# EAGLE board kinesisBLE V6 (EAGLE 9.6.2)
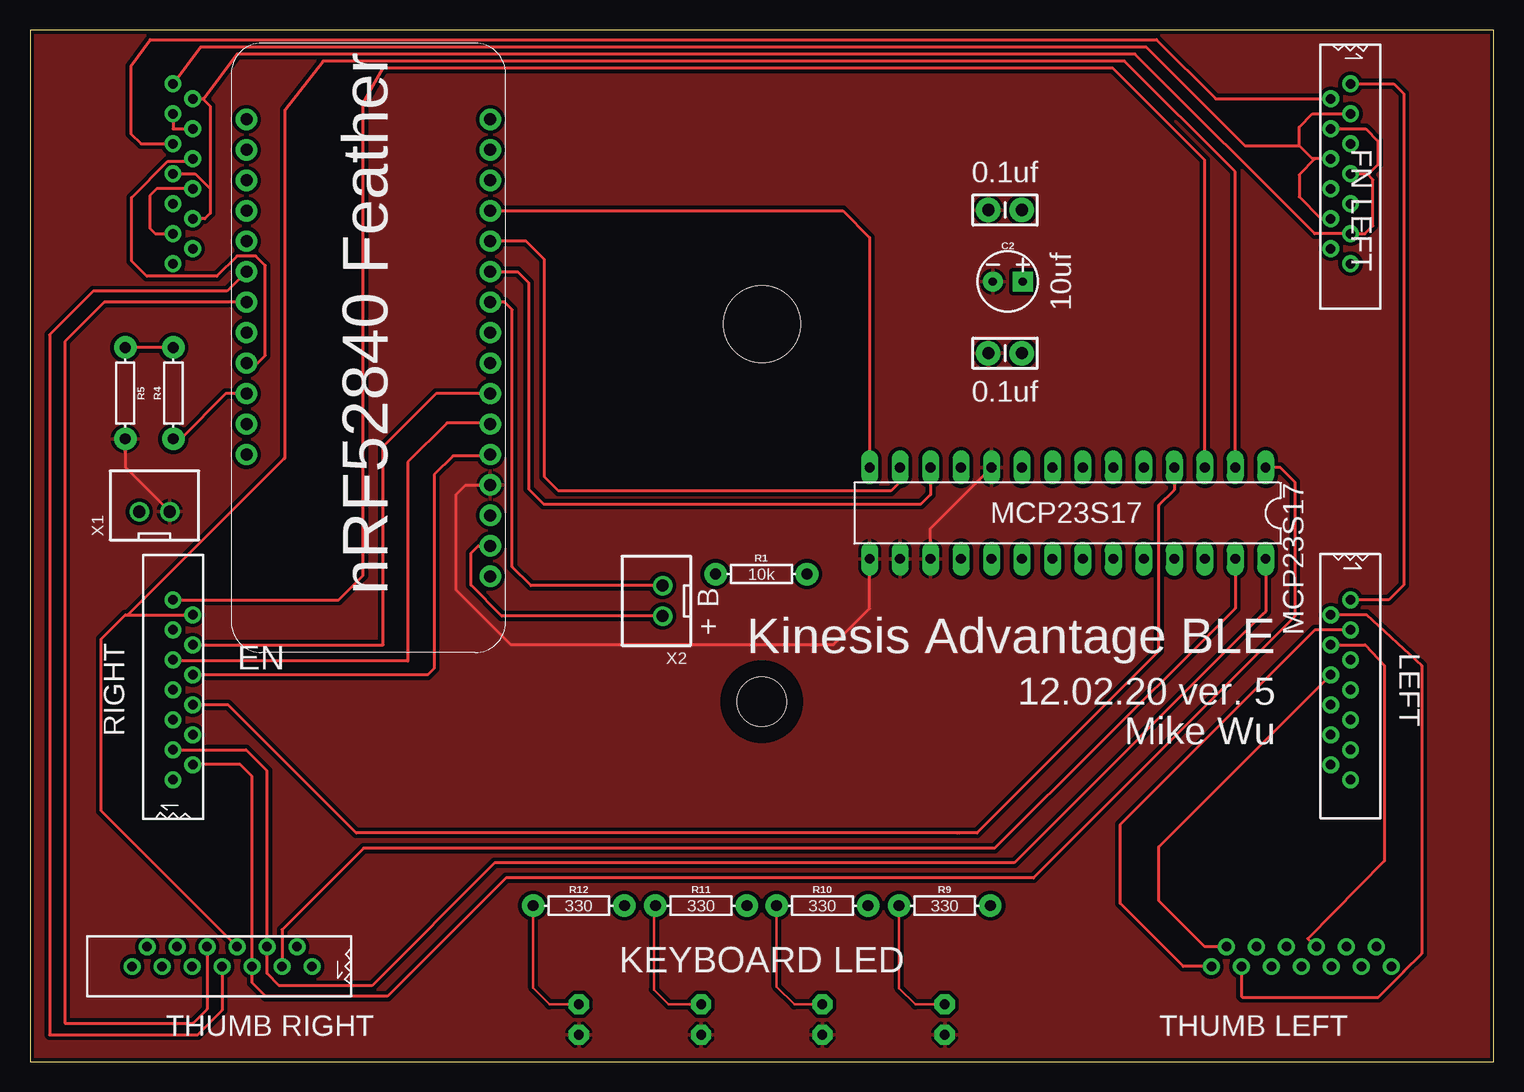
[diagram p0: board, top side]
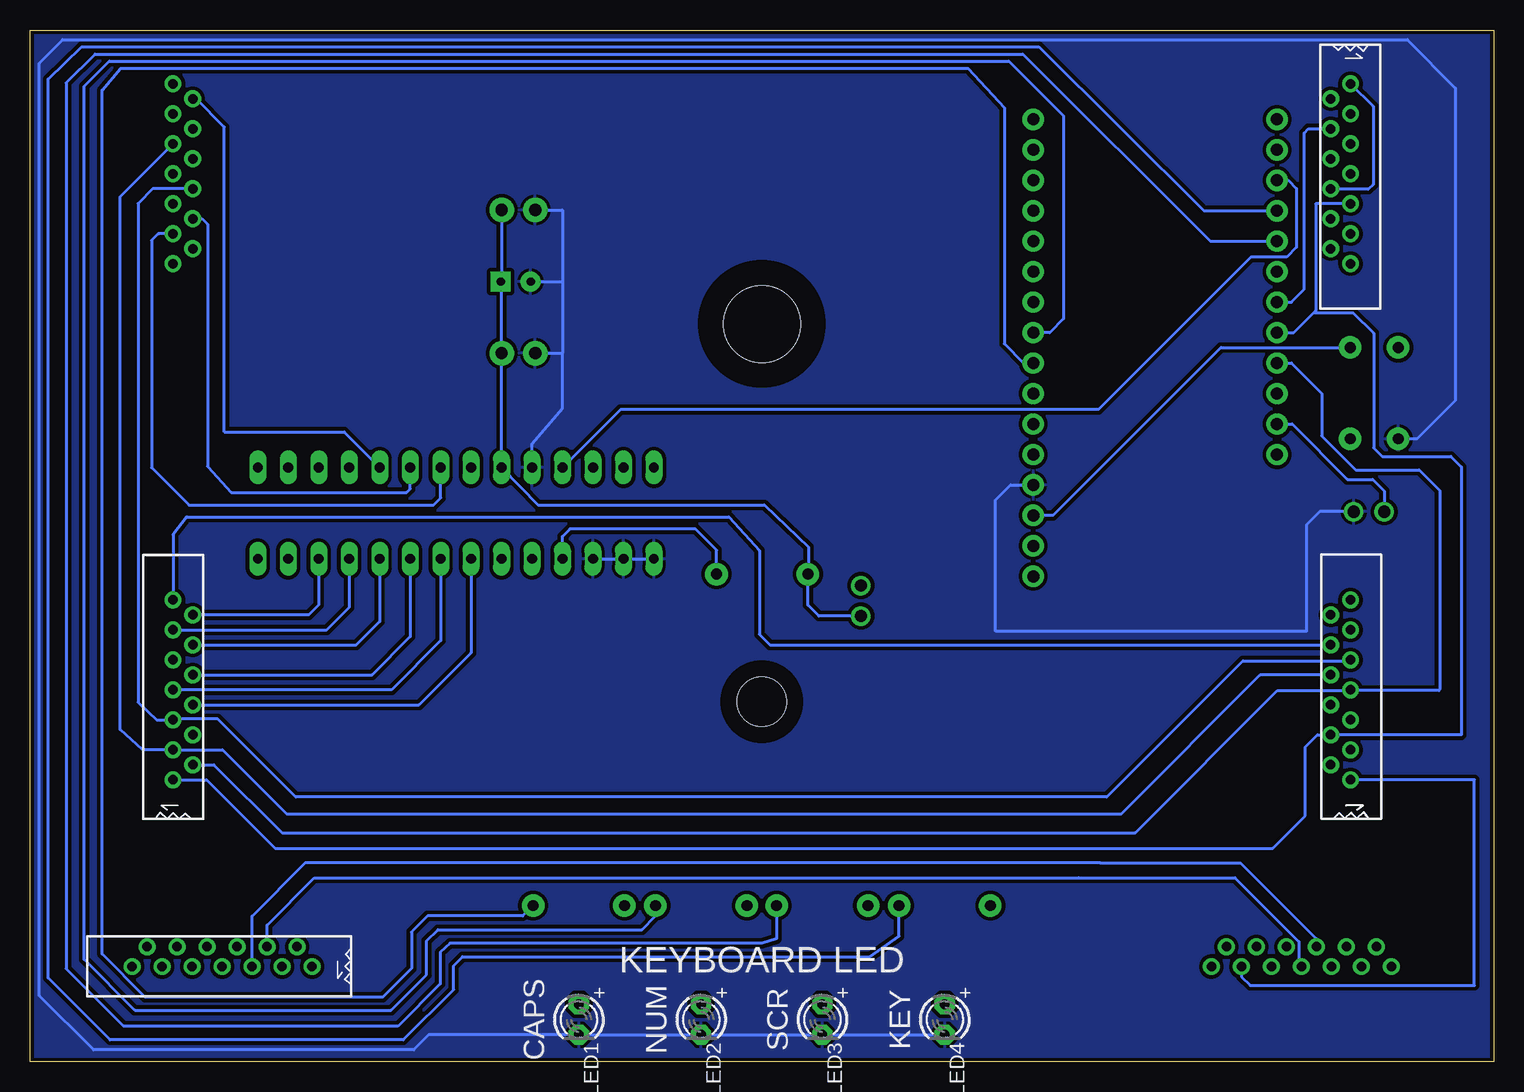
[diagram p1: board, bottom side, seen from below]

Size 122 x 86 mm. Coordinates in mm from the lower left corner, seen from the top.
Outline: 0,0 122,0 122,86 0,86 0,0
Copper layers (1*16): Top 0.035mm / dielectric 1.5mm / Bottom 0.035mm
Design rules "SparkFun": minimum track width 8mil, minimum drill 20mil, track to track 8mil, track to pad 8mil, pad to pad 8mil, via to via 8mil, smd to smd 8mil, copper to edge 10mil, drill to drill 8mil, minimum pad ring 12mil, minimum via ring 10mil, stop-mask expansion 4mil, vias tented up to drill 25mil, thermal gap 10mil
Holes 6.4 mm at 61,61.5
Holes 4.1 mm at 61,30
tKeepout: area 56,56.5 to 66,66.5; area 58.4,27.4 to 63.6,32.6
bKeepout: area 56,56.5 to 66,66.5; area 58.4,27.4 to 63.6,32.6
tRestrict: area 56,56.5 to 66,66.5; area 58.4,27.4 to 63.6,32.6
bRestrict: area 56,56.5 to 66,66.5; area 58.4,27.4 to 63.6,32.6
vRestrict: area 56,56.5 to 66,66.5; area 58.4,27.4 to 63.6,32.6

## Footprints (pad centres in the part's own frame; a part is rotated, then mirrored left to right if it is on the bottom)
CAP-PTH-SMALL-KIT = drill 1.016 pad 2.032: 1 -1.397,0; 2 1.397,0
CPOL-RADIAL-2.5MM-5MM = drill 0.7 pad 1.651 square: 1 1.25,0 | drill 0.7 pad 1.651: 2 -1.25,0
LED3MM = drill 0.813 pad 1.676 octagon: A -1.27,0; K 1.27,0
DIL28-3 = drill 0.813 long: 1 -16.51,-3.81; 2 -13.97,-3.81; 3 -11.43,-3.81; 4 -8.89,-3.81; 5 -6.35,-3.81; 6 -3.81,-3.81; 7 -1.27,-3.81; 8 1.27,-3.81; 9 3.81,-3.81; 10 6.35,-3.81; 11 8.89,-3.81; 12 11.43,-3.81; 13 13.97,-3.81; 14 16.51,-3.81; 15 16.51,3.81; 16 13.97,3.81; 17 11.43,3.81; 18 8.89,3.81; 19 6.35,3.81; 20 3.81,3.81; 21 1.27,3.81; 22 -1.27,3.81; 23 -3.81,3.81; 24 -6.35,3.81; 25 -8.89,3.81; 26 -11.43,3.81; 27 -13.97,3.81; 28 -16.51,3.81
AXIAL-0.3 = drill 0.9 pad 1.88: P$1 -3.81,0; P$2 3.81,0
NRF52FEATHER = drill 1 pad 1.778: 1 -17.78,-10.16; 2 -15.24,-10.16; 3 -12.7,-10.16; 4 -10.16,-10.16; 5 -7.62,-10.16; 6 -5.08,-10.16; 7 -2.54,-10.16; 8 0,-10.16; 9 2.54,-10.16; 10 5.08,-10.16; 11 7.62,-10.16; 12 10.16,-10.16; 13 12.7,-10.16; 14 15.24,-10.16; 15 17.78,-10.16; 16 20.32,-10.16; 17 20.32,10.16; 18 17.78,10.16; 19 15.24,10.16; 20 12.7,10.16; 21 10.16,10.16; 22 7.62,10.16; 23 5.08,10.16; 24 2.54,10.16; 25 0,10.16; 26 -2.54,10.16; 27 -5.08,10.16; 28 -7.62,10.16
TOPLINKS_STAPELBERG = drill 0.8: P$1 -0.08,7.51; P$2 1.57,6.26; P$3 -0.08,5.01; P$4 1.57,3.76; P$5 -0.08,2.51; P$6 1.57,1.26; P$7 -0.08,0.01; P$8 1.57,-1.24; P$9 -0.08,-2.49; P$10 1.57,-3.74; P$11 -0.08,-4.99; P$12 1.57,-6.24; P$13 -0.08,-7.49
JST-XH-02-PACKAGE-ROUND-PAD = drill 1.016: 1 -1.27,0; 2 1.27,0

## Placement (x,y rotation side)
C1  0.1uF  [CAP-PTH-SMALL-KIT]  81.28,59.05 0 top
C2  10uF  [CPOL-RADIAL-2.5MM-5MM]  81.51,65.02 0 top
C3  0.1uF  [CAP-PTH-SMALL-KIT]  81.28,70.99 0 top
LED1  [LED3MM]  76.25,3.5 270 bottom
LED2  [LED3MM]  66.05,3.5 270 bottom
LED3  [LED3MM]  55.95,3.5 270 bottom
LED4  [LED3MM]  45.75,3.5 270 bottom
MCP23S17  MCP23S17SP  [DIL28-3]  86.5,45.72 180 top
R1  10k  [AXIAL-0.3]  60.96,40.64 0 top
R4  10k  [AXIAL-0.3]  11.95,55.72 90 top
R5  10k  [AXIAL-0.3]  7.94,55.72 270 top
R9  330  [AXIAL-0.3]  76.25,13 0 top
R10  330  [AXIAL-0.3]  66.05,13 0 top
R11  330  [AXIAL-0.3]  55.95,13 0 top
R12  330  [AXIAL-0.3]  45.75,13 0 top
U$1  NRF52FEATHER  [NRF52FEATHER]  28.21,58.23 90 top
U$2  TOPLINKS_STAPELBERG  [TOPLINKS_STAPELBERG]  12,74 0 top
U$3  TOPLINKS_STAPELBERG  [TOPLINKS_STAPELBERG]  110,74 0 bottom
U$4  TOPLINKS_STAPELBERG  [TOPLINKS_STAPELBERG]  12,31 180 bottom
U$5  TOPLINKS_STAPELBERG  [TOPLINKS_STAPELBERG]  110,31 180 top
U$6  TOPLINKS_STAPELBERG  [TOPLINKS_STAPELBERG]  106,8 90 top
U$7  TOPLINKS_STAPELBERG  [TOPLINKS_STAPELBERG]  16,8 90 bottom
X1  JST-XH-02-PIN-ROUND-PAD  [JST-XH-02-PACKAGE-ROUND-PAD]  10.38,45.84 0 top
X2  JST-XH-02-PIN-ROUND-PAD  [JST-XH-02-PACKAGE-ROUND-PAD]  52.73,38.4 90 top

## Library data of the parts
C1 C3 = SparkFun-Capacitors; PROD_ID: CAP-08370
C2 = SparkFun-Capacitors; PROD_ID: CAP-08440
LED1-LED4 = adafruit
MCP23S17 = microchip; MF: MICROCHIP; MPN: MCP23S17-E/SP; OC_FARNELL: 1292238; OC_NEWARK: 31K2951
R1 R4 R5 = SparkFun-Resistors; PROD_ID: RES-09435
R9-R12 = SparkFun-Resistors; PROD_ID: RES-8371
U$1 = mike
U$2-U$7 = con-molex-39-53
X1 X2 = Rembrandt Electronics - JST XH Connectors v1-0

## Nets
3V@1: C1.2 C2.1 C3.2 MCP23S17.9 R1.P$1 U$1.2 X2.1
AREF: R4.P$2 R5.P$1 U$1.3
BLUE: U$1.10 X2.2
CAPS: R9.P$2 U$1.8
COL-A: MCP23S17.21 U$5.P$6
COL-B: MCP23S17.22 U$5.P$7
COL-C: MCP23S17.23 U$5.P$8 U$6.P$2
COL-D: MCP23S17.24 U$5.P$10 U$6.P$8
COL-E: MCP23S17.25 U$5.P$11 U$6.P$1
COL-F: MCP23S17.26 U$5.P$12 U$6.P$3
COL-G: MCP23S17.27 U$4.P$1 U$7.P$3
COL-H: MCP23S17.28 U$4.P$3 U$7.P$4
COL-I: MCP23S17.1 U$4.P$2 U$7.P$5
COL-J: MCP23S17.2 U$4.P$12 U$7.P$6
COL-K: MCP23S17.3 U$4.P$13
COL-L: MCP23S17.4 U$4.P$6
COL-M: MCP23S17.5 U$2.P$5 U$3.P$2
COL-N: MCP23S17.6 U$2.P$1 U$2.P$8 U$2.P$11 U$3.P$3 U$3.P$6 U$3.P$10
COL-O: MCP23S17.7 U$2.P$2 U$2.P$7 U$2.P$10 U$3.P$4 U$3.P$7 U$3.P$11
EN: U$1.27 X1.1
GND: C1.1 C2.2 C3.1 LED1.K LED2.K LED3.K LED4.K MCP23S17.10 MCP23S17.15 MCP23S17.16 MCP23S17.17 R5.P$2 U$1.4 X1.2
KEY: R12.P$2 U$1.20
MISO: MCP23S17.14 U$1.13
MOSI: MCP23S17.13 U$1.12
N$1: LED1.A R9.P$1
N$2: U$3.P$13
N$3: U$3.P$12
N$4: MCP23S17.18 R1.P$2
N$5: R4.P$1 U$1.26
N$6: U$3.P$9
N$10: LED2.A R10.P$1
N$11: LED3.A R11.P$1
N$12: LED4.A R12.P$1
N$19: U$5.P$9
N$21: MCP23S17.8
N$24: U$5.P$4
N$39: U$2.P$12
N$40: U$2.P$13
N$44: U$4.P$5
N$50: U$4.P$11
N$54: U$6.P$13
N$55: U$6.P$11
N$56: U$6.P$12
N$57: U$6.P$10
N$58: U$6.P$9
N$60: U$6.P$7
N$61: U$6.P$6
N$67: U$7.P$1
N$68: U$7.P$2
N$75: U$7.P$9
N$76: U$7.P$10
N$77: U$7.P$11
N$78: U$7.P$12
N$79: U$7.P$13
NUM: R10.P$2 U$1.9
ROW-1: U$1.7 U$3.P$1 U$4.P$10 U$5.P$13
ROW-2: U$1.6 U$3.P$8 U$4.P$9 U$5.P$5
ROW-3: U$1.5 U$3.P$5 U$4.P$8 U$5.P$3
ROW-4: U$1.25 U$2.P$6 U$4.P$7 U$5.P$2
ROW-5: U$1.24 U$2.P$9 U$4.P$4 U$5.P$1
ROW-6: U$1.23 U$2.P$3 U$2.P$4 U$6.P$5 U$7.P$8
ROW-7: U$1.22 U$6.P$4 U$7.P$7
SCK: MCP23S17.12 U$1.11
SCR: R11.P$2 U$1.21
SS: MCP23S17.11 U$1.19
VBAT: U$1.28

## Tracks (layer width: path | path; a pad name or v marks a point on that pad's centre or on a via)
3V@1
  Top 0.254: X2.1 39.33,37.13 36.75,39.71 36.75,42.38 37.36,42.99 U$1.2
  Bottom 0.245: C3.2 82.68,64.92
  Bottom 0.254: C2.1 82.68,64.92 C1.2 MCP23S17.9 79.66,46.4 60.79,46.4 57.12,42.9 57.12,40.67 R1.P$1 57.15,38.05 56.23,37.13 X2.1
AREF
  Top 0.254: R4.P$2 R5.P$1
  Bottom 0.254: R4.P$2 22.71,59.53 36.72,45.53 U$1.3
BLUE
  Top 0.254: X2.2 41.76,39.67 40.19,41.24 40.19,62.68 39.56,63.31 U$1.10
CAPS
  Bottom 0.203: 90.05,10.95 90.2,10.8
  Bottom 0.254: 90.05,10.95 88.87,12.13 80.93,12.13 R9.P$2 | U$1.8 39.17,58.23 40.78,59.84 40.78,79.53 43.8,82.8 114.45,82.8 116,81 116,8.97 112.4,5.37 92.59,5.37 90.2,7.76 90.2,10.8
COL-A
  Bottom 0.254: U$5.P$6 89.56,29.74 85.23,34.07 MCP23S17.21
COL-B
  Bottom 0.254: U$5.P$7 91.87,30.99 87.77,35.09 MCP23S17.22
COL-C
  Top 0.254: U$5.P$8 94.09,17.9 94.09,13.4 97.92,9.57 U$6.P$2
  Bottom 0.254: U$5.P$8 93.49,32.24 90.31,35.42 MCP23S17.23
COL-D
  Top 0.254: U$5.P$10 111.31,34.74 112.9,33.02 112.9,16.72 106.52,10.23 U$6.P$8
  Bottom 0.254: U$5.P$10 94.8,34.74 92.85,36.69 MCP23S17.24
COL-E
  Top 0.254: U$5.P$11 107.11,35.99 90.88,19.76 90.88,13.17 96.13,7.92 U$6.P$1
  Bottom 0.254: U$5.P$11 97.26,35.99 95.38,37.87 95.39,37.88 MCP23S17.25
COL-F
  Top 0.254: U$5.P$12 108.44,37.25 111.41,37.25 116,33.01 116,8.99 114.53,7.51 114.53,7.49 112.4,5.37 101.05,5.37 100.99,5.43 U$6.P$3
  Bottom 0.254: U$5.P$12 98.76,37.24 97.93,38.07 MCP23S17.26
COL-G
  Top 0.254: MCP23S17.27 100.47,37.79 98.34,35.66 80.42,17.78 27.81,17.78 21.01,10.98 U$7.P$3
  Bottom 0.254: U$7.P$3 21.01,7.07 20.28,6.34 1.6,6.34 1.6,23.49 U$4.P$1
COL-H
  Top 0.254: MCP23S17.28 103.01,37.53 102.74,37.26 82.05,16.57 38.74,16.57 28.5,6.33 20.77,6.33 19.76,7.34 U$7.P$4 19.76,24.25 18.07,25.93 18.02,25.99 U$4.P$3
COL-I
  Top 0.254: MCP23S17.1 104.22,49.53 105.43,48.32 105.43,37.11 83.66,15.31 39.67,15.31 29.81,5.45 19.63,5.45 18.51,6.57 U$7.P$5 18.51,23.79 17.54,24.76 13.59,24.76 U$4.P$2
COL-J
  Top 0.254: U$7.P$6 5.95,20.88 5.95,35.24 7.95,37.24 8.14,37.24 | 8.14,37.24 U$4.P$12 | 8.14,37.24 21.18,50.28 21.27,50.28 21.27,79.34 24.43,83.4 91.24,83.4 100.47,74.17 MCP23S17.2
COL-K
  Top 0.254: U$4.P$13 25.73,38.49 27.75,40.51 27.75,79.91 29.44,82.8 90.29,82.8 97.93,75.16 MCP23S17.3
COL-L
  Top 0.254: MCP23S17.4 95.39,47.66 94.11,46.38 94.11,34.21 78.95,19.05 77.47,19.05 77.29,19.05 27.2,19.05 16.51,29.74 U$4.P$6
COL-M
  Top 0.254: U$2.P$5 9.25,76.51 8.41,77.35 8.41,82.98 10.02,85.2 93.91,85.2 98.85,80.26 U$3.P$2
  Bottom 0.254: MCP23S17.5 95.81,52.49 105.8,52.49 105.8,77.9 108.15,80.26 U$3.P$2
COL-N
  Top 0.254: U$2.P$1 14.21,84.6 93.03,84.6 101.26,76.37 105.8,76.37 | U$2.P$8 10.56,72.76 9.98,72.18 9.98,69.47 10.44,69.01 U$2.P$11 | 105.8,76.37 106.9,75.26 U$3.P$6 107.12,75.26 105.8,73.93 105.8,72.09 107.64,70.25 107.65,70.26 U$3.P$10 | 105.8,76.37 105.8,77.9 106.91,79.02 U$3.P$3
  Bottom 0.254: U$2.P$1 10.04,79.63 10.04,73.12 10.44,72.72 13.53,72.72 U$2.P$8 | MCP23S17.6 90.31,47.75 90.62,47.44 105.21,47.44 107.2,49.62 107.2,69.81 107.65,70.26 U$3.P$10
COL-O
  Top 0.254: U$3.P$4 111.34,77.76 112.37,76.73 112.37,74.77 111.61,74.01 111.46,74.01 | U$3.P$7 111.46,74.01 | 111.46,74.01 111.95,73.52 111.95,69.68 111.28,69.01 U$3.P$11 107.1,69.01 92.11,84 17.25,84 14.46,80.21 13.62,80.21 U$2.P$2 14.41,80.26 15.03,79.64 15.03,72.76 | 15.03,72.76 14,73.8 13.98,73.8 13.77,74.01 U$2.P$7 | 15.03,72.76 15.03,70.71 14.58,70.26 U$2.P$10
  Bottom 0.254: U$3.P$11 111.24,69.01 111.28,69.05 111.86,68.47 111.86,49.51 108.73,46.38 88.37,46.38 87.77,46.98 MCP23S17.7
EN
  Bottom 0.254: U$1.27 16.79,53.15 12.18,48.54 10.08,48.54 9.11,47.57 X1.1
GND
  Top 0.254: MCP23S17.17 75.07,44.45 MCP23S17.10 | U$1.4 38.33,48.03 36.28,48.03 35.49,47.24 35.49,39.35 40.08,34.76 66.99,34.76 69.99,37.76 MCP23S17.15 | R5.P$2 7.94,49.55 X1.2
  Bottom 0.254: 77.61,59.08 77.61,54.45 80.16,51.49 80.15,51.47 MCP23S17.10 | C1.1 77.61,59.08 | LED4.K LED3.K LED2.K LED1.K 88.75,2.23 90.01,0.97 116.69,0.97 121.22,5.5 121.22,83.22 119.27,85.2 7.18,85.2 3.18,81.16 3.18,55.12 6.39,51.91 R5.P$2 | C3.1 77.61,70.99 77.61,65.02 | C2.2 77.61,65.02 | 77.61,65.02 77.61,59.08 | MCP23S17.17 MCP23S17.16 MCP23S17.15 | X1.2 14.5,45.84 15.59,44.75 15.59,35.86 41.51,35.86 41.51,46.82 40.26,48.07 U$1.4
  pour Top (isolate 0.305): 0,86 122,86 122,0 121.92,0 0,0
  pour Bottom (isolate 0.305): 0,86 122,86 122,0 0,0
KEY
  Bottom 0.254: R12.P$2 49.56,10.44 52,8.74 85.94,8.74 86.68,8 86.68,6 90.88,1.8 115.33,1.8 120.5,6.97 120.5,81.9 117.7,84.6 37.9,84.6 24.13,70.93 U$1.20
MISO
  Top 0.254: U$1.13 67.75,70.93 69.99,68.69 MCP23S17.14
MOSI
  Top 0.254: MCP23S17.13 72.53,48.33 71.77,47.57 44.05,47.57 42.89,48.73 42.89,66.86 41.36,68.39 U$1.12
N$1
  Top 0.203: LED1.A 73.79,4.77 72.44,6.12 R9.P$1
N$4
  Bottom 0.254: R1.P$2 64.77,42.64 66.53,44.4 77,44.4 77.61,43.79 MCP23S17.18
N$5
  Top 0.254: U$1.26 16.33,55.69 12.55,51.91 R4.P$1
N$10
  Top 0.203: LED2.A 63.71,4.77 62.24,6.24 R10.P$1
N$11
  Top 0.203: R11.P$1 52,12.86 52,6 53.23,4.77 LED3.A
N$12
  Top 0.203: LED4.A 43.31,4.77 41.94,6.14 R12.P$1
NUM
  Bottom 0.254: R10.P$2 69.86,12.14 71,11 88,11 88.94,10.06 88.94,7.25 91.9,4.28 113.26,4.28 117.5,8.52 117.5,81.3 115.39,83.4 40.41,83.4 35.84,78.84 35.84,61.93 37,60.77 U$1.9
ROW-1
  Top 0.254: U$3.P$1 113.68,81.51 114.5,80.69 114.5,39.72 113.27,38.49 U$5.P$13 | U$1.7 33.87,55.69 29.44,51.26 29.44,34.75 U$4.P$10
  Bottom 0.254: U$5.P$13 110.08,43.92 108.93,45.4 63.73,45.4 61.2,42.59 61.2,35.61 60.32,34.73 U$4.P$10
ROW-2
  Top 0.254: U$1.6 38.28,53.24 34.75,53.24 31.48,49.97 31.48,33.38 12.03,33.38 U$4.P$9
  Bottom 0.254: 110.49,28.49 111.44,28.49 113,29.96 113,71.54 111.78,72.76 U$3.P$8 | 110.49,28.49 U$5.P$5 | 110.49,28.49 110.41,28.57 106.36,28.57 99.84,22.05 32.23,22.05 20.88,33.4 12.01,33.4 U$4.P$9
ROW-3
  Top 0.254: U$1.5 38.25,50.49 35.26,50.49 33.7,48.93 33.7,32.78 33.15,32.23 U$4.P$8
  Bottom 0.254: U$4.P$8 13.6,32.21 19.47,32.21 31.02,20.66 100.62,20.66 105.95,25.99 U$5.P$3 112.62,25.99 114.5,27.67 114.5,72.09 U$3.P$5
ROW-4
  Top 0.254: U$1.25 18.97,58.23 19.61,58.87 19.61,66.37 18.82,67.16 17.26,67.16 15.58,65.47 9.74,65.47 8.47,66.74 8.47,72.03 11.49,75.05 13.36,75.05 U$2.P$6
  Bottom 0.254: U$5.P$2 106.67,24.74 101,19.07 29.87,19.07 18,30.94 11.97,30.94 | 11.97,30.94 U$4.P$7 | U$1.25 16.85,58.23 14.32,55.7 14.32,52.15 11.5,49.33 6.2,49.33 4.48,47.61 4.48,31.01 4.55,30.94 11.97,30.94
ROW-5
  Bottom 0.254: U$5.P$1 107.28,23.49 101.57,17.78 18.41,17.78 15.7,20.5 15.7,26.21 14.67,27.24 U$4.P$4 2.68,27.24 2.68,49.57 3.56,50.45 9.29,50.45 10,51.16 10,60.71 11.71,62.42 14.99,62.42 15,62.43 | U$2.P$9 14.82,71.51 14.82,62.61 15,62.43 | 15,62.43 16.66,60.77 U$1.24
ROW-6
  Top 0.254: U$7.P$8 14.77,4.37 13.58,3.19 2.9,3.19 2.9,60.01 6.2,63.31 U$1.23 | U$2.P$3 11.92,77.77 11.91,77.76 U$2.P$4
  Bottom 0.254: U$7.P$8 14.76,10.23 21.09,16.56 23.64,16.56 32.8,16.57 99.05,16.57 103.49,12.12 U$6.P$5 | U$1.23 16.85,63.31 15.78,64.38 15.78,77.4 15.42,77.76 U$2.P$4
ROW-7
  Top 0.254: U$1.22 16.43,64.23 5.28,64.23 1.64,60.59 1.64,2.23 13.96,2.23 16.01,4.28 U$7.P$7
  Bottom 0.254: U$7.P$7 16.23,8.13 16.23,10 21.54,15.32 34.6,15.32 98.3,15.31 102.24,11.37 U$6.P$4
SCK
  Top 0.254: MCP23S17.12 75.07,47.27 74.26,46.46 42.83,46.46 41.58,47.71 41.58,64.92 40.65,65.85 U$1.11
SCR
  Bottom 0.254: R11.P$2 59.76,10.24 61,9.87 86.99,9.87 87.81,9.12 87.81,6.47 91.33,2.95 114.2,2.95 119,7.75 119,81.6 116.58,84 39.23,84 23.6,68.39 U$1.21
SS
  Bottom 0.254: U$1.19 17.12,73.47 16.43,72.78 16.43,67.88 17.24,67.07 20.23,67.07 32.92,54.37 72.77,54.37 MCP23S17.11

## Text on the board
tPlace: 0.1uf | FN LEFT | 10uf | 0.1uf | MCP23S17 | 10k | nRF52840 Feather | B | + | EN | Kinesis Advantage BLE | RIGHT | LEFT | 12.02.20 ver. 5 | Mike Wu | 330 | 330 | 330 | 330 | KEYBOARD LED | THUMB RIGHT | THUMB LEFT
bPlace: KEYBOARD LED | KEY | SCR | NUM | CAPS